# Altium PCB Regulator.PcbDoc
Units mil, origin at the board's own origin, x right, y up, seen from the top; angles counter-clockwise.
Board outline 24000 x 20000 mil, 2 copper layers (Top Layer, Bottom Layer); 23 components, 9 nets, 62 pads, 40 vias.
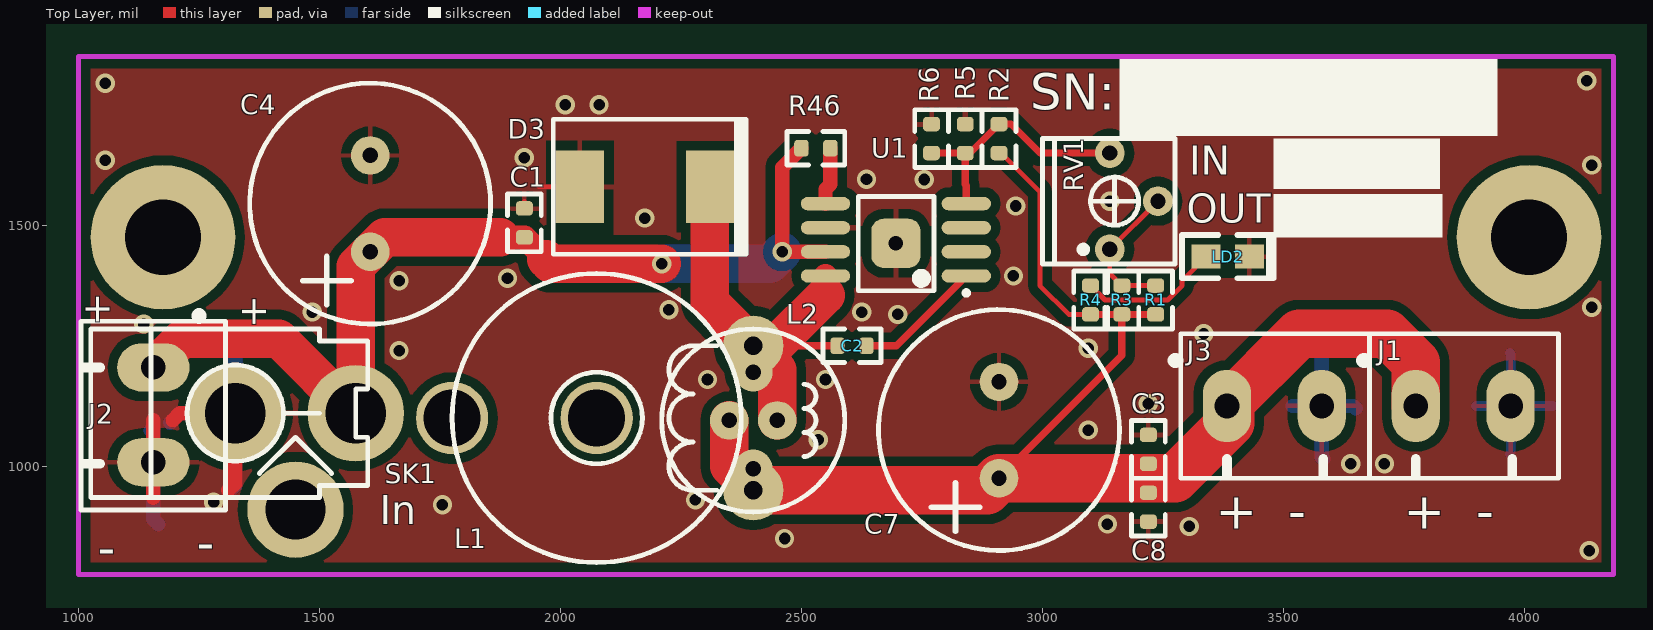
[diagram p0: Top Layer view]
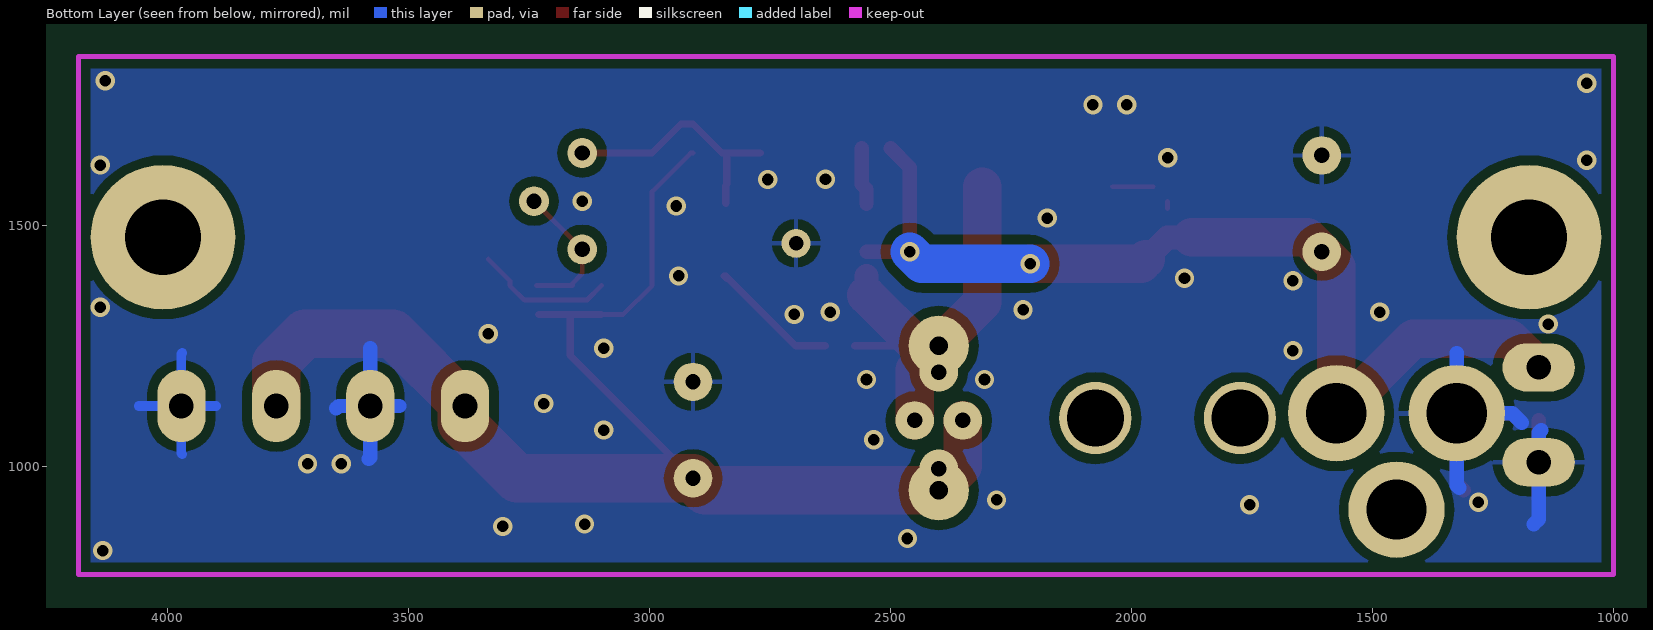
[diagram p1: Bottom Layer view, seen from below]

## Layer stack, top to bottom
Top Layer: signal copper 1.4
Dielectric: dielectric 12.6, FR-4, Dk 4.8
Bottom Layer: signal copper 1.4

## Board outline
0,0 24000,0 24000,20000 0,20000

## Design rules (kind name [scope] priority, off if disabled: settings)
Clearance Clearance_poly [InPoly] p1: gap=20
Clearance [All] p2: gap=7
ComponentClearance [All] p1 off: gap=10 collisioncheckmode=3 verticalgap=10 showdistances=FALSE
FabricationTestPointUsage TestPointUsage [All] p1: valid=0 allowmultiple=FALSE
FabricationTestpoint Testpoint [(IsPad And (OnTopLayer Or OnBottomLayer))] p1: side=3 testpointundercomponent=TRUE minsize=40 maxsize=100 preferedsize=60 minholesize=0 maxholesize=40 preferedholesize=32 testpointgrid=1 allowsidetop=TRUE allowsidebottom=TRUE usegrid=TRUE gridtolerance=0.01
HoleSize [All] p1: absolutevalues=TRUE maxlimit=300 minlimit=24 maxpercent=80.000 minpercent=20.000
MinimumAnnularRing [All] p1: minimumring=8
PlaneClearance [All] p1: clearance=12
PolygonConnect PolygonConnect_via [IsVia] p1: connectstyle=Direct reliefconductorwidth=10 reliefentries=4 polygonreliefangle="90 Angle" airgapwidth=10
PolygonConnect [All] p2: connectstyle=Relief reliefconductorwidth=10 reliefentries=4 polygonreliefangle="90 Angle" airgapwidth=10
RoutingVias [All] p1: holewidth=24 width=40 viastyle="Through Hole" minholewidth=24 minwidth=35 maxholewidth=28 maxwidth=50
SilkscreenOverComponentPads [All] p1: minsilkscreentomaskgap=10
SolderMaskExpansion [All] p1: expansion=4
Width [All] p1: maxlimit=150 minlimit=10 preferedwidth=10
22 further rules are at their usual default settings.

## Components (designator, comment, footprint, x,y, rotation, side; value= is the part's Value field where it differs from the comment)
C1 "100n" 0603 1925,1535 r270 top
C2 "10n" 0603 2635,1250 r180 top
C3 "100n" 0603 3220,1005 r90 top
C4 "2200u 25V" RB.2/.5 1605,1445 r270 top
C7 "2200u 25V" RB.2/.5 2910,975 r270 top
C8 "100n" 0603 3220,945 r270 top
D3 "SK56C" SMC 2175,1580 r180 top
J1 "CON2" Terms5mm2 3775,1125 r0 top
J2 "CON2" Terms5mm2 1155,1205 r270 top
J3 "CON2" Terms5mm2 3383.15,1125 r0 top
L1 "22uH 3A" INDUCTOR3A 2075,1100 r270 top
L2 "22uH 1A" INDUCTOR6B 2400,1095 r0 top
LD2 "LED-S" 0805Diode 3430,1435 r180 top
R1 "DNF" 0603 3235,1375 r270 top
R2 "LINK" 0603 2910,1650 r90 top
R3 "DNF" 0603 3165,1375 r270 top
R4 "1k" 0603 3100,1315 r90 top
R5 "DNF" 0603 2840,1710 r270 top
R6 "DNF" 0603 2770,1710 r270 top
R46 "470k" 0603 2560,1660 r180 top
RV1 "DNF" VR3362P 3140,1550 r270 top
SK1 "SOCKETDC" SKTPWR 1575,1110 r0 top
U1 "LM22674" PSOP-8 2696.1,1462.59 r180 top

## Footprints (in the part's own frame and the unit in brackets; to place one, negate y for a bottom-side part, rotate by r counter-clockwise, add the part's x,y. Pads: shape width x height; smd on the part's side, far side on the other; paste and mask are expansions set on the pad)
0603 [mil]
  rrect50% 30x35 smd: 1(0,0) 2(60,0)
  silkscreen extent -30,-35 90,35
0805Diode [mil]
  rect 60x50 smd: A(90,0) K(0,0)
  silkscreen extent -50,-45 140,45
INDUCTOR3A [mil]
  round 125 hole 39: 1(-150,325) 2(150,325)
  round 150 hole 118: 3(0,0) 4(0,-300)
  silkscreen extent -300,-300 300,300
INDUCTOR6B [mil] "380mil dia"
  round 80 hole 32: 1(0,100) 1(50,0) 2(-50,0) 2(0,-100)
  silkscreen extent -190,-190 190,190
PSOP-8 [mm]
  oval 2.6x0.7 smd: 1(-3.711,1.717) 2(-3.711,0.447) 3(-3.711,-0.823) 4(-3.711,-2.093) 5(3.711,-2.093) 6(3.711,-0.823) 7(3.711,0.447) 8(3.711,1.717)
  rrect50% 2.6x2.6 smd: 9(0,0)
  silkscreen extent -3.84,-2.47 1.99,2.74
RB.2/.5 [mil]
  round 80 hole 32: 1(0,0) 2(-200,0)
  silkscreen extent -350,-250 150,250
SKTPWR [mil]
  round 200 hole 125: COM(-250,0) PIN(0,0) SW(-125,-200)
  silkscreen extent -550,-175 25,175
SMC [mil]
  rect 100x150 smd: A(135,0) K(-135,0)
  silkscreen extent -210,-140 190,140
Terms5mm2 [mil]
  oval 100x150 hole 51: 1(0,0) 2(196.85,0)
  silkscreen extent -108,-150 296,150
VR3362P [mil]
  round 62 hole 32: CCW(-100,0) CW(100,0) W(0,100)
  silkscreen extent -130,-140 130,135

## Part data
C1 C2 C3 C8: library part CAP
C4 C7: library part "CAPACITOR POL"
D3: library part "DIODE SCHOTTKY"
L1 L2: library part INDUCTOR2
LD2: "LED"
R1 R2 R3 R4 R5 R6 R46: library part RES8
RV1: library part RES6
SK1: "DC Power Connector"
U1: library part LM22675, "1A SMPS"

## Free pads (board coordinates)
  round 60 hole 30: 0(2696.1,1462.59)
  round 300 hole 157 paste+0: ""(1175,1475) ""(4010,1475)

## Via types
v1: diameter 40, hole 24, Top Layer to Bottom Layer, tented both sides, 40 vias

## Nets (pads, with @x,y where several pads share a name; then routed paths per layer and width w, separated by ;. In a path a pad name is that pad's centre, name@x,y a point inside that pad or via, vN(x,y) a via of type N, cw(c..) or ccw(c..) an arc to the next point about the centre after c; other vN are vias at no path point)
GND: C1.1 C3.2 C4.2 C7.2 C8.2 D3.A J1.2 J2.2 J3.2 LD2.K pad.0 R5.1 R6.1 SK1.COM U1.6 U1.9 | length 1923.9
  Top Layer w10: C1.1 1925,1550 ; 1955,1580 D3.A
  Top Layer w30: 1155,935 J2.2 1155,1095 ; 1195,1095 1210,1110 SK1.COM 1325,965 1310,950
  Bottom Layer w20: 3900,1125 J1.2 ; 3970,1025 3971.85,1026.85 J1.2 ; 3970,1235 3971.85,1233.15 J1.2 ; 4060,1125 J1.2
  Bottom Layer w30: 1150,1075 1155,1070 J2.2 1155,890 1165,880 ; 1190,1090 1210,1110 SK1.COM ; 1320,955.02 1325,960.02 SK1.COM ; 1325,1235 SK1.COM ; 3520,1125 J3.2 ; 3580,1245 J3.2 ; 3583.15,1015 3580,1018.15 J3.2 ; 3650,1120 3645,1125 J3.2
  other v1: 4135,825 2465,850 3305,875 3135,880 1755,920 1280,925 2280,930 3640,1005 3710,1005 2535,1055 3095,1075 3220,1130 2305,1180 2550,1180 1665,1240 3095,1245 3335,1275 1135,1295 2700,1315 1485,1320 2625,1320 2225,1325 4140,1330 1665,1385 1890,1390 2940,1395 2175,1515 2945,1540 3140,1550 2755,1595 2635,1595.59 4140,1625 1055,1635 1925,1640 2010,1750 2080,1750 1055,1795 4130,1800
NetC1_2: C1.2 C4.1 J2.1 R46.2 SK1.PIN U1.7 | length 2092.2
  Top Layer w30: R46.2 2460,1620 v1(2460,1445) U1.7
  Top Layer w50: 1875,1475 C1.2 1970,1430
  Top Layer w80: J2.1 1215,1265 1415,1265 SK1.PIN@1575,1105 ; SK1.PIN 1575,1415 C4.1 ; 1875,1475 1635,1475 C4.1@1613.13,1453.13 ; 1970,1430 1980,1420 v1(2210,1420) ; C4.1 C4.1@1613.13,1453.13 ; C4.1 C4.1@1613.13,1453.13
  Bottom Layer w80: v1(2210,1420) 2435,1420 v1(2460,1445)
NetC2_1: C2.1 U1.1 | length 274.3
  Top Layer w15: C2.1 2697.2,1250 U1.1 ; U1.1@2840,1390 U1.1@2845,1395
NetC2_2: C2.2 D3.K L1.1 L2.1 U1.8 | length 861.5
  Top Layer w15: L1.1@2445,1250 C2.2
  Top Layer w50: 2550,1355 U1.8
  Top Layer w80: D3.K 2310,1340 L1.1 2450,1200 L2.1@2450,1095 ; L1.1@2445,1250 2550,1355
NetLD2_A: LD2.A R4.2 | length 288.5
  Top Layer w10: R4.2 3130,1345 3260,1345 3290,1375 3290,1385 LD2.A@3335,1430
NetR1_1: R1.1 R3.1 RV1.CW RV1.W | length 301.8
  Top Layer w10: R3.1@3160,1375 R1.1 ; R3.1 3140,1400 RV1.CW RV1.W
NetR2_2: R2.2 R5.2 R6.2 RV1.CCW U1.4 | length 525.6
  Top Layer w15: R6.2 R5.2 ; U1.4 2842.2,1582.8 2840,1585 R5.2 ; RV1.CCW 2995,1650 2935,1710 R2.2 2850,1650 R5.2
NetR46_1: R46.1 U1.5 | length 119.1
  Top Layer w30: U1.5 2550,1575 2560,1585 R46.1
VCC: C3.1 C7.1 C8.1 J1.1 J3.1 L1.2 L2.2 R1.2 R2.1 R3.2 R4.1 | length 2848.2
  Top Layer w10: R2.1 2915,1650 2995,1570 2995,1375 3055,1315 R4.1 ; J1.1 J1.1@3780,1130
  Top Layer w15: C7.1 3165,1230 R3.2 ; R4.1 R3.2 ; R1.2@3230,1315 R3.2
  Top Layer w80: L2.2@2350,1095 2350,1000 L1.2
  Top Layer w100: L1.2 2885,950 C7.1 3275,975 3390,1090 J3.1@3390,1130 ; J3.1 3533.15,1275 3715,1275 3775,1215 J1.1
pads on no net: L1.3 L1.4 SK1.SW U1.2 U1.3

## Polygon pours and split planes (outlines as drawn)
GND on Top Layer "GND" (solid, remove dead copper, pour order 5): 4185,1850 4185,775 1000,775 1000,1850
GND on Bottom Layer "GND" (solid, remove dead copper, pour order 3): 1000,1850 1000,775 4185,775 4185,1850

## Keep-outs
Keep-Out Layer:
  lines w10: 1000,775 4185,775 4185,1850 1000,1850 1000,1475 1000,1400 1000,775

## Silkscreen, mask and mechanical layers (free items; w line width, h text height)
Top Overlay:
  rectangle: 3480,1575 3825,1680
  rectangle: 3480,1475 3830,1565
  rectangle: 3160,1685 3945,1845
  text "SN:" at 2975,1740 h75
  text "IN" at 3305,1605 h60
  text "OUT" at 3300,1505 h60
  text "+" at 1015,1360 h60 r270
  text "+" at 1340,1355 h60 r270
  text "In" at 1625,880 h60
  text "+  -" at 3360,870 h75
  text "+  -" at 3750,870 h75
  text "-" at 1245,805 h75
  text "-" at 1040,795 h75
Mechanical 1:
  lines w10: 1000,775 4185,775 4185,1850 1000,1850 1000,775

## Dimensions
1000,1850 to 1000,775 on Mechanical 3
1000,775 to 4185,775 on Mechanical 3